# Altium PCB pcb.PcbDoc
Units mil, origin at the board's own origin, x right, y up, seen from the top; angles counter-clockwise.
Board outline 2230.57 x 740 mil, 2 copper layers (Top Layer, Bottom Layer); 9 components, 5 nets, 18 pads, 0 vias.
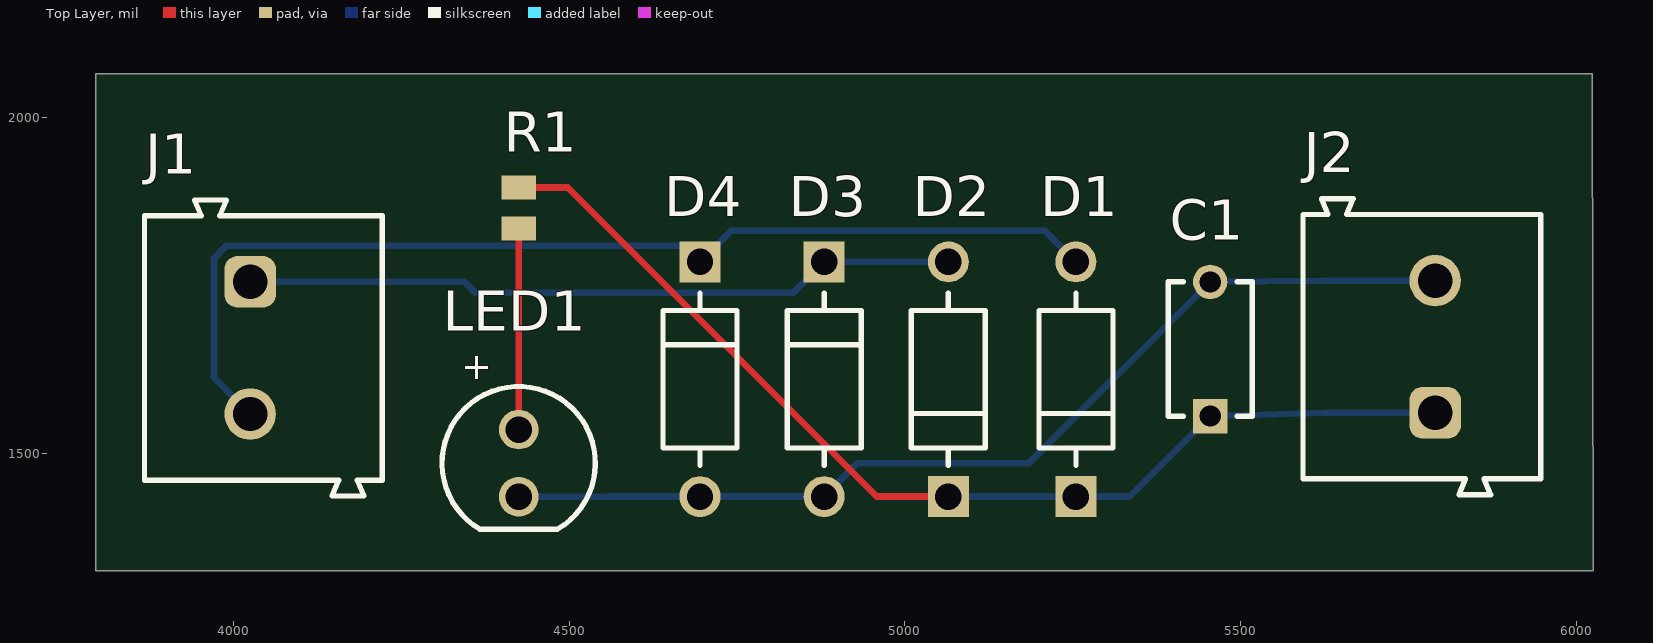
[diagram p0: Top Layer view]
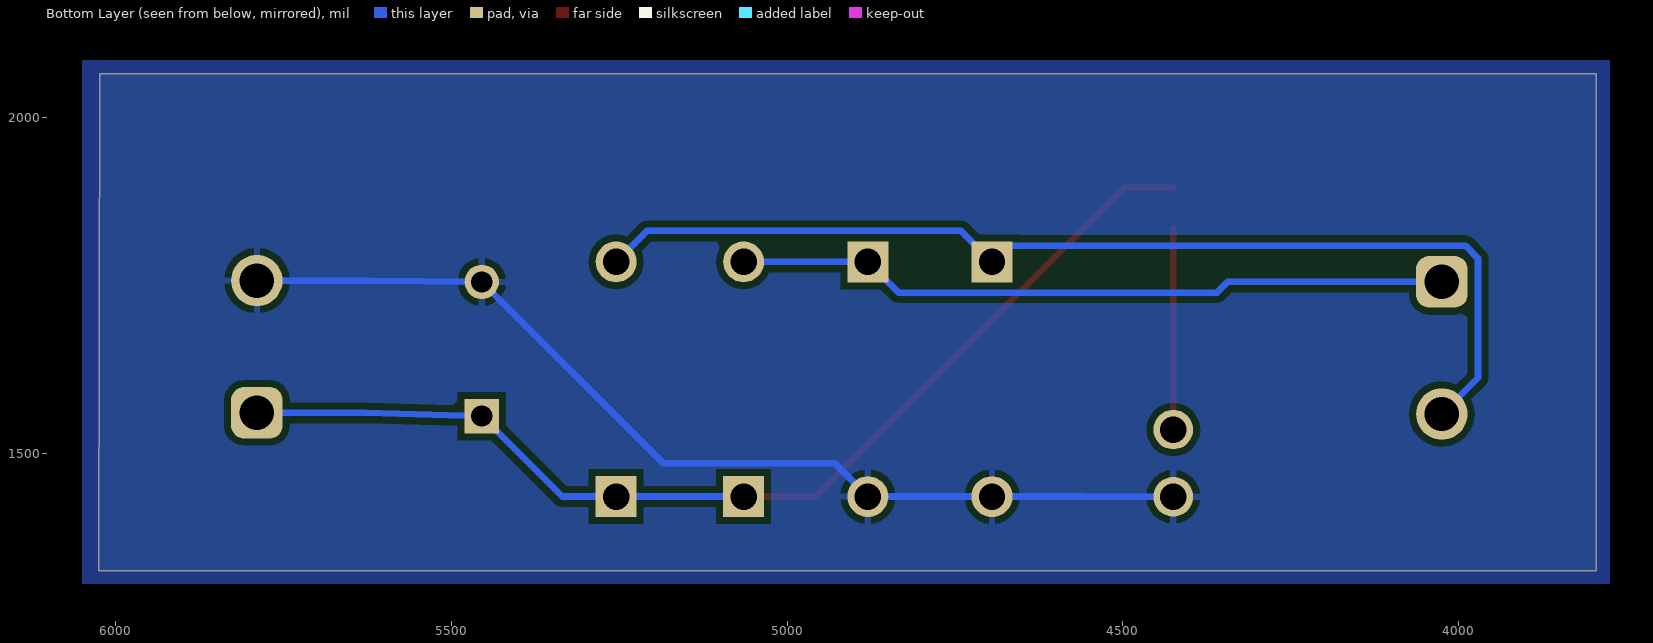
[diagram p1: Bottom Layer view, seen from below]

## Layer stack, top to bottom
Top Solder: solder mask 0.4, Solder Resist, Dk 3.5
Top Layer: signal copper 1.4
Dielectric 1: dielectric 12.6, FR-4, Dk 4.8
Bottom Layer: signal copper 1.4
Bottom Solder: solder mask 0.4, Solder Resist, Dk 3.5

## Board outline
6025.57,1325 3795,1325 3795,2065 6024.33,2065

## Design rules (kind name [scope] priority, off if disabled: settings)
Clearance [All] p1: gap=10 ignorepadtopadclearanceinfootprint=FALSE
PolygonConnect [All] p1: connectstyle=Relief reliefconductorwidth=10 reliefentries=4 polygonreliefangle="90 Angle" airgapwidth=10
RoutingVias [All] p1: holewidth=28 width=50 viastyle="Through Hole" minholewidth=28 minwidth=50 maxholewidth=28 maxwidth=50
SolderMaskExpansion [All] p1: expansion=4 istentingtop=FALSE
SupplyNets "Schematic Supply Nets" [InNet('GND')] p1: voltage=0.000
Width [All] p1: maxlimit=10 minlimit=10 preferedwidth=10
30 further rules are at their usual default settings.

## Components (designator, comment, footprint, x,y, rotation, side; value= is the part's Value field where it differs from the comment)
C1 "C322C104K5R5TA" FP-C322C104K5R5TA-MFG 5455,1655 r90 top
D1 "1N4007" FP-1N4007-MFG 5255,1610 r90 top value=15pF
D2 "1N4007" FP-1N4007-MFG 5065,1610 r90 top value=15pF
D3 "1N4007" FP-1N4007-MFG 4880,1610 r270 top value=15pF
D4 "1N4007" FP-1N4007-MFG 4695,1610 r270 top value=15pF
J1 "691101710002" 691101710002 54044.69,-48343.43 r270 top
J2 "691101710002" 691101710002 -44229.69,51658.43 r90 top
LED1 "15400585A3590" WL-TIRW_D5.8H8.6 4425,1485 r270 top
R1 "TNPW08051K00BEEN" RESC2013X55X40LL15T20 4425,1865 r90 top

## Footprints (in the part's own frame and the unit in brackets; to place one, negate y for a bottom-side part, rotate by r counter-clockwise, add the part's x,y. Pads: shape width x height; smd on the part's side, far side on the other; paste and mask are expansions set on the pad)
691101710002 [mm] "5,00mm - modular - blue - Horizontal entry with pressure clamp - 12,6mm height - 02p"
  rrect50% 1.95x1.95 hole 1.3: 1(-1272.5,-1270.5)
  round 1.95 hole 1.3: 2(-1267.5,-1270.5)
  silkscreen extent -1275.6,-1274.5 -1264.4,-1265.5, body extent -1275.6,-1274.5 -1264.4,-1265.5, height 12.65
FP-1N4007-MFG [mm]
  rect 1.55x1.55 hole 1 paste-2539.97 mask+0: 1(-4.44,0)
  round 1.55 hole 1 paste-2539.97 mask+0: 2(4.44,0)
  silkscreen extent -3.27,-1.4 3.27,1.4, body extent -5.32,-1.5 5.32,1.5, height 0.25
FP-C322C104K5R5TA-MFG [mm]
  rect 1.3x1.3 hole 0.8 paste-2539.97 mask+0: 1(-2.54,0)
  round 1.3 hole 0.8 paste-2539.97 mask+0: 2(2.54,0)
  silkscreen extent -2.54,-1.59 2.54,1.59, body extent -3.29,-1.69 3.29,1.69, height 0.25
RESC2013X55X40LL15T20 [mm] "Chip Resistor, 2-Leads, Body 2.00x1.25mm, IPC High Density"
  rect 0.9x1.3 smd: 1(-0.775,0) 2(0.775,0)
  body extent -1.07,-0.7 1.07,0.7, height 0.55
WL-TIRW_D5.8H8.6 [mm] "THT Infrared Round Waterclear, body diameter 5.8mm"
  round 1.5 hole 1: 1(1.27,0) 2(-1.27,0)
  silkscreen extent -2.9,-2.9 2.5,2.9, body extent -2.9,-2.9 2.5,2.9, height 9.1

## Part data
C1: library part CMP-03020-034661-1, "CAP CER 0.1UF 50V X7R RADIAL", Capacitance=100nF, Case/Package=Radial, Dielectric=X7R, Dielectric Material=Ceramic, Max Operating Temperature=125°C, Min Operating Temperature=-55°C, Package Quantity=500, Tolerance=10%, Voltage=50V, Construction=RADIAL, Depth=3.18mm, Dissipation Factor=2.5%, Height=3.18mm, Height - Seated (Max)=0.26inch, Lead Diameter=0.51mm, Lead Free="Lead Free", Lead Length=7mm, Lead Pitch=5.08mm, Lead/Base Style="Formed Leads", Length=5.08mm, Material=Ceramic, Mount="Through Hole", Number of Pins=2, Packaging=Bulk, Radiation Hardening=No, REACH SVHC="No SVHC", RoHS Compliant=Yes, Series="Golden Max™", Termination=Radial, Voltage Rating=50V, Voltage Rating (DC)=50V, Weight=0.0625lb, Width=0.125inch
D1 D2 D3 D4: library part CMP-123542-000001-1, "Rectifier diode 1000 V 1 A DO-41, ,", Capacitance=15pF, Forward Current=1A, Manufacturer=Diotec, Max Junction Temp=+175°C, Max Repetitive Reverse Voltage=1000V, Max Surge Forward Current=27A, Peak Reverse Current=5uA, Temperature="-50°C to +175°C", Temperature Range Low=-50°C, Automotive=No, Category=Diode, ComponentLink2Description=Datasheet, ComponentLink2URL=https://datasheet.octopart.com/1N4007-Diotec-datasheet-62346875.pdf, Device Class L1="Discrete Semiconductors", Device Class L2=Diodes, Device Class L3="Rectifier Diodes", Height=2.8mm, Ipc Land Pattern Name=DIOAD888W100L520D280, Lead Free=Yes, Manufacturer Part Number=1N4007, Octopart=https://octopart.com/1n4007-diotec-4040411, Package=1N4007, Reverse Voltage=1000V, RoHS=TRUE, Temperature Range High=+175°C
J1 J2: library part CMP-1502-03256-3, "Conn Terminal Block 2 POS 5mm Solder ST Thru-Hole 16A Box", Color=Blue, Current=16A, Max Operating Temperature=105°C, Min Operating Temperature=-40°C, Voltage=250V, Contact Material=Brass, Contact Plating=Tin, Current Rating=16A, Height=12.8mm, Housing Material=Nylon, Lead Pitch=5mm, Length=9mm, Mount="Through Hole", Number of Contacts=2, Number of Levels=1, Number of Pins=2, Number of Positions Per Level=2, Number of Rows=1, Packaging=Box, Pitch=5.0038mm, Plating=Steel, RoHS=Compliant, Stripping Length=-7mm, Termination=Screw, Voltage Rating=250V, Width=11.2mm, Wire Gauge (Max)=26AWG, Wire Gauge (Min)=14AWG, Wire/Cable Gauge=26AWG
LED1: library part CMP-03913-82270985-2, "WL-TIRW THT Infrared Round Waterclear", Forward Current=1A, Forward Voltage=1.5V, Max Reverse Voltage (DC)=5V, Packaging=Bulk, Peak Wavelength=850nm, RoHS=Compliant, Viewing Angle=35°, Wavelength=850nm
R1: library part CMP-2001-04738-1, Manufacturer="Vishay Dale", Part Number=TNPW08051K00BEEN

## Nets (pads, with @x,y where several pads share a name; then routed paths per layer and width w, separated by ;. In a path a pad name is that pad's centre, name@x,y a point inside that pad or via, vN(x,y) a via of type N, cw(c..) or ccw(c..) an arc to the next point about the centre after c; other vN are vias at no path point)
GND: C1.2 D3.2 D4.2 J2.2 LED1.1 | length 1497.6
  Bottom Layer w10: LED1.1 4559,1435 4559.2,1435.2 D4.2 D3.2 4929.8,1485 5185,1485 C1.2 5623.85,1756.85 J2.2
NetC1_1: C1.1 D1.1 D2.1 J2.1 R1.2 | length 1605.4
  Top Layer w10: R1.2 4498,1895.51 4958.32,1435.2 D2.1
  Bottom Layer w10: D2.1 D1.1 5335.2,1435.2 C1.1 5628,1560 J2.1
NetD1_2: D1.2 D4.1 J1.2 | length 1594.4
  Bottom Layer w10: J1.2 3971,1612.15 3971,1790 3990,1809 4670.8,1809 D4.1 4741.2,1831 5208.8,1831 D1.2
NetD2_2: D2.2 D3.1 J1.1 | length 1065.6
  Bottom Layer w10: J1.1 4344,1755 4360,1739 4834.2,1739 D3.1 D2.2
NetLED1_2: LED1.2 R1.1 | length 299.5
  Top Layer w10: LED1.2 R1.1

## Polygon pours and split planes (outlines as drawn)
GND on Bottom Layer "GND_L02_P000" (solid, remove dead copper, pour order 0): 3775,1305 6050,1305 6050,2085 3775,2085

## Text inside footprints (layer, text, board x,y; h text height)
LED1: Top Overlay "+" at 4345,1650 h40 r270